# EAGLE board RoverWing-cover (EAGLE 9.2.2)
REV: C
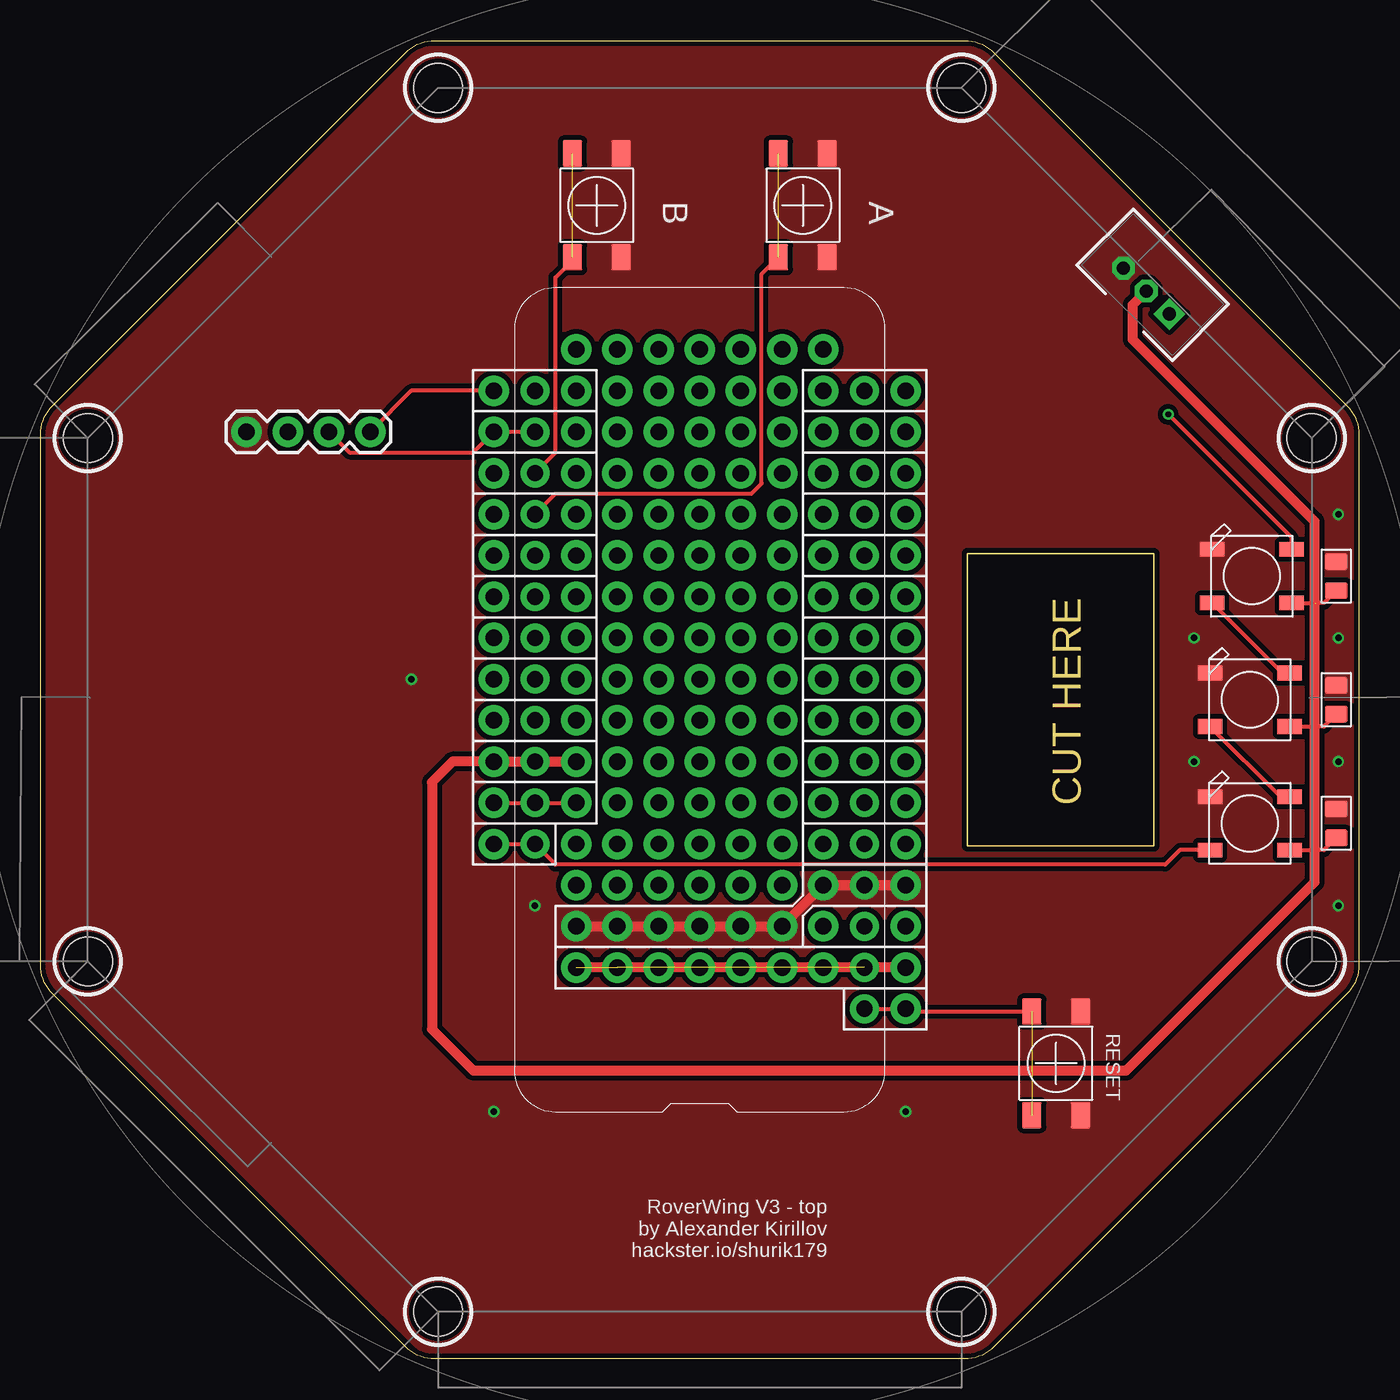
[diagram p0: board, top side]
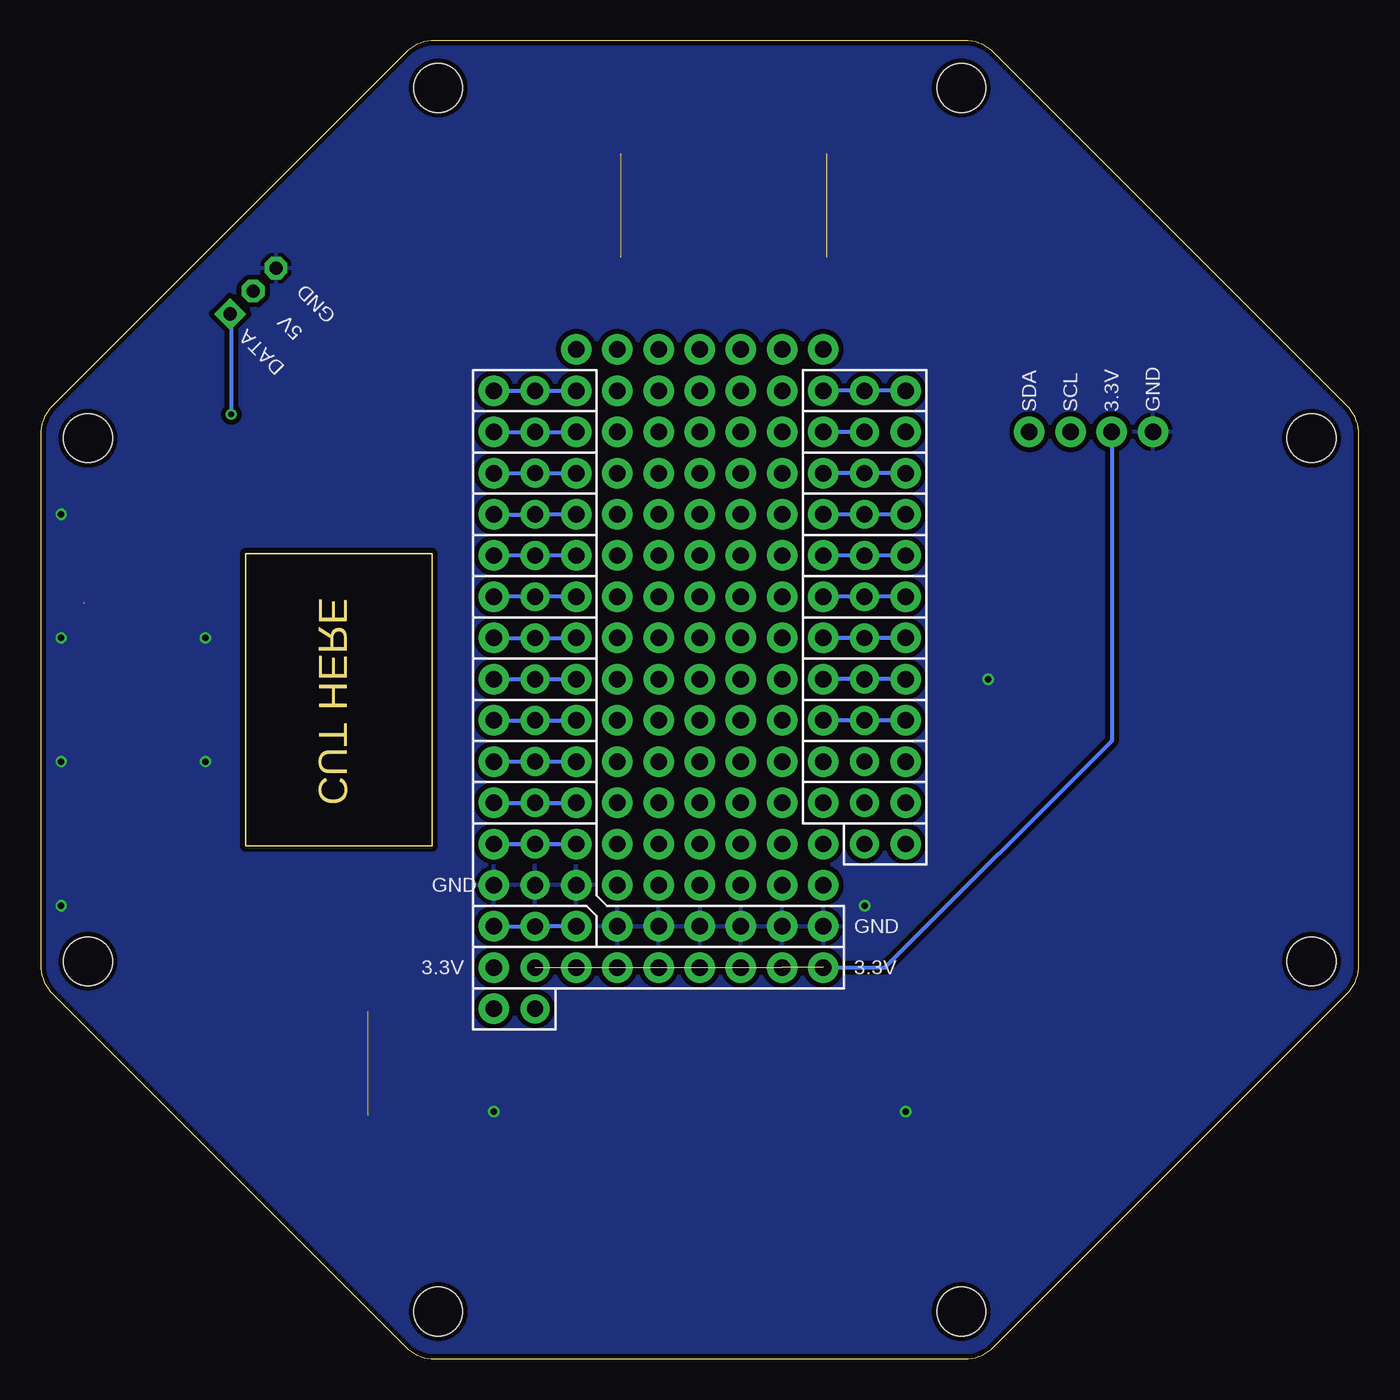
[diagram p1: board, bottom side, seen from below]

Size 81.28 x 81.28 mm. Coordinates in mm from the lower left corner, seen from the top.
Outline: 0,24.29 0,56.99 arc-45 0.74,58.78 22.5,80.54 arc-45 24.29,81.28 56.99,81.28 arc-45 58.78,80.54 80.54,58.78 arc-45 81.28,56.99 81.28,24.29 arc-45 80.54,22.5 58.78,0.74 arc-45 56.99,0 24.29,0 arc-45 22.5,0.74 0.74,22.5 arc-45 0,24.29
Outline: 57.15,49.64 68.65,49.64 68.65,31.64 57.15,31.64 57.15,49.64
Copper layers (1*16): Top 0.035mm / dielectric 1.5mm / Bottom 0.035mm
Design rules "SeeedStudio_2layer_DRU_no_angle_20140221": minimum track width 6mil, minimum drill 12mil, track to track 6mil, track to pad 6mil, pad to pad 6mil, via to via 6mil, smd to smd 0mil, copper to edge 10mil, drill to drill 10mil, minimum pad ring 10mil, minimum via ring 6mil, stop-mask expansion 2mil, vias tented up to drill 100mil, thermal gap 10mil
Net classes: 1 thinpower: width 0.305 mm; 2 thickpower: width 0.406 mm

## Footprints (pad centres in the part's own frame; a part is rotated, then mirrored left to right if it is on the bottom)
C0805 = smd 1.397 x 1.016: 1 0,0.889; 2 0,-0.889
B3B-PH-K = drill 0.813 pad 1.397 square: 1 -2,0 | drill 0.813 pad 1.397 octagon: 2 0,0; 3 2,0
1X04 = drill 1.016 pad 1.88: 1 0,0; 2 2.54,0; 3 5.08,0; 4 7.62,0
1X12_NO_SILK = drill 1.016 pad 1.88: 1 0,0; 2 2.54,0; 3 5.08,0; 4 7.62,0; 5 10.16,0; 6 12.7,0; 7 15.24,0; 8 17.78,0; 9 20.32,0; 10 22.86,0; 11 25.4,0; 12 27.94,0
1X16_NO_SILK = drill 1.016 pad 1.88: 1 0,0; 2 2.54,0; 3 5.08,0; 4 7.62,0; 5 10.16,0; 6 12.7,0; 7 15.24,0; 8 17.78,0; 9 20.32,0; 10 22.86,0; 11 25.4,0; 12 27.94,0; 13 30.48,0; 14 33.02,0; 15 35.56,0; 16 38.1,0
1X07_NO_SILK = drill 1.016 pad 1.88: 1 0,0; 2 2.54,0; 3 5.08,0; 4 7.62,0; 5 10.16,0; 6 12.7,0; 7 15.24,0
FEATHERWING_DIM = drill 1 pad 1.778: 1 6.35,1.27; 2 8.89,1.27; 3 11.43,1.27; 4 13.97,1.27; 5 16.51,1.27; 6 19.05,1.27; 7 21.59,1.27; 8 24.13,1.27; 9 26.67,1.27; 10 29.21,1.27; 11 31.75,1.27; 12 34.29,1.27; 13 36.83,1.27; 14 39.37,1.27; 15 41.91,1.27; 16 44.45,1.27; 17 44.45,21.59; 18 41.91,21.59; 19 39.37,21.59; 20 36.83,21.59; 21 34.29,21.59; 22 31.75,21.59; 23 29.21,21.59; 24 26.67,21.59; 25 24.13,21.59; 26 21.59,21.59; 27 19.05,21.59; 28 16.51,21.59
WS2812B = smd 1.5 x 0.9: 1-VDD 2.45,-1.65; 2-DOUT 2.45,1.65; 3-GND -2.45,1.65; 4-DIN -2.45,-1.65
TL3305 = smd 1.6 x 1.2: 1 -3.2,1.5; 2 -3.2,-1.5; 3 3.2,-1.5; 4 3.2,1.5
MOUNTINGHOLE_3.0_NPH = hole 3: 0,0

## Placement (x,y rotation side)
C1  0.1uF  [C0805]  79.88,33.02 0 top
C2  0.1uF  [C0805]  79.88,40.64 0 top
C3  0.1uF  [C0805]  79.88,48.26 0 top
FRAME2  FRAME-LETTERNO_PACKAGE  [DUMMY]  77.85,82.17 0 top
J1  HEADER-PH-3P  [B3B-PH-K]  68.18,65.84 135 top
J2  [1X04]  12.7,57.15 0 top
J3  [1X12_NO_SILK]  27.94,31.75 90 top
J4  [1X16_NO_SILK]  53.34,59.69 270 top
J5  [1X07_NO_SILK]  33.02,59.69 0 top
J6  [1X07_NO_SILK]  33.02,57.15 0 top
J7  [1X07_NO_SILK]  33.02,54.61 0 top
J9  [1X07_NO_SILK]  33.02,52.07 0 top
J10  [1X07_NO_SILK]  33.02,49.53 0 top
J11  [1X07_NO_SILK]  33.02,46.99 0 top
J12  [1X07_NO_SILK]  33.02,44.45 0 top
J13  [1X07_NO_SILK]  33.02,41.91 0 top
J15  [1X07_NO_SILK]  33.02,39.37 0 top
J16  FEATHERWING_NODIM  [FEATHERWING_DIM]  52.07,15.24 90 top
J17  [1X07_NO_SILK]  33.02,36.83 0 top
J18  [1X07_NO_SILK]  33.02,34.29 0 top
J19  [1X07_NO_SILK]  33.02,31.75 0 top
J20  [1X07_NO_SILK]  33.02,29.21 0 top
J21  [1X07_NO_SILK]  33.02,26.67 0 top
J22  [1X07_NO_SILK]  33.02,24.13 0 top
J23  [1X07_NO_SILK]  33.02,62.23 0 top
LED1  WS2812B5050  [WS2812B]  74.55,33.02 0 top
LED2  WS2812B5050  [WS2812B]  74.55,40.64 0 top
LED3  WS2812B5050  [WS2812B]  74.68,48.26 0 top
S1  SW-TACTILE-4.5X4.5_SMD  [TL3305]  62.61,18.23 270 top
S2  SW-TACTILE-4.5X4.5_SMD  [TL3305]  46.99,71.12 90 top
S3  SW-TACTILE-4.5X4.5_SMD  [TL3305]  34.29,71.12 90 top
U$3  MOUNTINGHOLE3.0_NPH  [MOUNTINGHOLE_3.0_NPH]  24.51,2.92 0 top
U$4  MOUNTINGHOLE3.0_NPH  [MOUNTINGHOLE_3.0_NPH]  56.77,2.92 0 top
U$14  MOUNTINGHOLE3.0_NPH  [MOUNTINGHOLE_3.0_NPH]  2.92,24.51 0 top
U$15  MOUNTINGHOLE3.0_NPH  [MOUNTINGHOLE_3.0_NPH]  2.92,56.77 0 top
U$24  MOUNTINGHOLE3.0_NPH  [MOUNTINGHOLE_3.0_NPH]  78.36,24.51 0 top
U$25  MOUNTINGHOLE3.0_NPH  [MOUNTINGHOLE_3.0_NPH]  78.36,56.77 0 top
U$26  MOUNTINGHOLE3.0_NPH  [MOUNTINGHOLE_3.0_NPH]  24.51,78.36 0 top
U$27  MOUNTINGHOLE3.0_NPH  [MOUNTINGHOLE_3.0_NPH]  56.77,78.36 0 top

## Library data of the parts
C1-C3 S1-S3 = RoverWing
FRAME2 = SparkFun-Aesthetics; DESIGNER: Nobody; VERSION: v01
J1 = RoverWing; PARTNO: B3B-PH-K-S(LF)(SN)
J2 = SparkFun-Connectors; PROD_ID: CONN-09696
J3-J7 J9-J13 J15 J17-J23 = SparkFun-Connectors
J16 = RoverShield
LED1-LED3 = adafruit
U$3 U$4 U$14 U$15 U$24-U$27 = CrickitCopy

## Nets
3.3V: J2.2 J4.15 J16.2 J22.1 J22.2 J22.3 J22.4 J22.5 J22.6 J22.7
5V: C1.2 C2.2 C3.2 J1.2 J3.3 J16.26 J17.1 LED1.1-VDD LED2.1-VDD LED3.1-VDD
A0: J4.12 J16.5 J19.7
A1: J4.11 J16.6 J18.7
A2: J4.10 J16.7 J17.7
A3: J4.9 J15.7 J16.8
A4: J4.8 J13.7 J16.9
A5: J4.7 J12.7 J16.10
AREF: J4.14 J16.3 J21.7
D05: J3.10 J7.1 J16.19 S3.1 S3.4
D06: J3.9 J9.1 J16.20 S2.1 S2.4
D09: J3.8 J10.1 J16.21
D10: J3.7 J11.1 J16.22
D11: J3.6 J12.1 J16.23
D12: J3.5 J13.1 J16.24
D13: J3.4 J15.1 J16.25
EXTRA: J4.1 J5.7 J16.16
FEATHER_RESET: J4.16 J16.1 S1.2 S1.3
GND: C1.1 C2.1 C3.1 J1.3 J2.1 J4.13 J16.4 J20.7 J21.1 J21.2 J21.3 J21.4 J21.5 J21.6 LED1.3-GND LED2.3-GND LED3.3-GND S1.1 S1.4 S2.2 S2.3 S3.2 S3.3
MISO: J4.4 J9.7 J16.13
MOSI: J4.5 J10.7 J16.12
N$1: LED2.2-DOUT LED3.4-DIN
N$3: LED1.2-DOUT LED2.4-DIN
N$6: J19.1
N$37: J3.2 J16.27 J18.1
NEOPIXEL_IN: J3.1 J16.28 LED1.4-DIN
NEOPIXEL_OUT: J1.1 LED3.2-DOUT
RX: J4.3 J7.7 J16.14
SCK: J4.6 J11.7 J16.11
SCL: J2.3 J3.11 J6.1 J16.18
SDA: J2.4 J3.12 J5.1 J16.17
TX: J4.2 J6.7 J16.15

## Tracks (layer width: path | path; a pad name or v marks a point on that pad's centre or on a via)
3.3V  (7 unrouted)
  Top 0.61: J4.15 J22.1
  Bottom 0.254: J22.1 29.21,24.13 15.24,38.1 J2.2
5V  (1 unrouted)
  Top 0.254: 78.55,29.82 78.55,29.4 | LED1.1-VDD 78.29,31.37 78.55,31.12 | C1.2 79.12,31.37 78.55,31.37 | LED2.1-VDD 78.29,38.99 78.55,38.73 | C2.2 79.12,38.99 78.55,38.99 | LED3.1-VDD 78.61,46.61 | C3.2 79.12,46.61 78.55,46.61
  Top 0.406: 78.61,46.61 | LED2.1-VDD
  Top 0.61: J17.1 J16.26 J3.3 25.4,36.83 24.13,35.56 24.13,20.32 26.67,17.78 66.93,17.78 78.55,29.4 78.55,31.12 78.55,31.37 78.55,38.73 78.55,38.99 78.55,46.61 78.55,51.63 67.31,62.87 67.31,64.97 J1.2
A0
  Bottom 0.254: J4.12 J16.5 J19.7
A1
  Bottom 0.254: J4.11 J16.6 J18.7
A2
  Bottom 0.254: J4.10 J16.7 J17.7
A3
  Bottom 0.254: J4.9 J16.8 J15.7
A4
  Bottom 0.254: J4.8 J16.9 J13.7
A5
  Bottom 0.254: J4.7 J16.10 J12.7
AREF
  Bottom 0.254: J4.14 J16.3 J21.7
D05  (1 unrouted)
  Top 0.254: J16.19 31.75,55.88 31.75,66.67 32.79,67.72 S3.1
  Bottom 0.254: J3.10 J16.19 J7.1
D06  (1 unrouted)
  Top 0.254: J16.20 31.75,53.34 43.81,53.34 44.45,53.98 44.45,66.88 S2.1
  Bottom 0.254: J3.9 J16.20 J9.1
D09
  Bottom 0.254: J3.8 J16.21 J10.1
D10
  Bottom 0.254: J3.7 J16.22 J11.1
D11
  Bottom 0.254: J3.6 J16.23 J12.1
D12
  Bottom 0.254: J3.5 J16.24 J13.1
D13
  Bottom 0.254: J3.4 J16.25 J15.1
EXTRA
  Bottom 0.254: J5.7 J16.16 J4.1
FEATHER_RESET  (1 unrouted)
  Top 0.254: J16.1 J4.16 53.51,21.43 S1.2
GND  (via drill 0.39)
  Top 0.61: J21.1 J21.6 J20.7 J4.13
  other vias: 80.01,44.45 71.12,36.83 30.48,27.94 53.34,15.24 80.01,36.83 22.86,41.91 27.94,15.24 71.12,44.45 80.01,52.07 80.01,27.94
  pour Bottom (isolate 0.305, rank 2): 23.24,81.28 -0.13,57.4 0.02,22.99 23.5,0.02 58.04,-0.13 81.28,23.11 81.28,57.91 58.04,81.28
  pour Top (isolate 0.305, rank 2, no thermals): 23.37,81.28 0,57.4 -0.11,32.64 -0.05,23.35 23.75,0.27 58.42,0.12 81.41,23.11 81.41,57.91 58.17,81.28
MISO
  Bottom 0.254: J9.7 J16.13 J4.4
MOSI
  Bottom 0.254: J10.7 J16.12 J4.5
N$1
  Top 0.254: LED2.2-DOUT 76.55,42.29 LED3.4-DIN
N$3
  Top 0.254: LED1.2-DOUT 76.42,34.67 LED2.4-DIN
N$37
  Top 0.254: J3.2 J16.27 J18.1
NEOPIXEL_IN
  Top 0.254: LED1.4-DIN 70.23,31.37 69.34,30.48 31.75,30.48 J16.28 J3.1
NEOPIXEL_OUT  (via drill 0.35)
  Top 0.254: LED3.2-DOUT 77.13,50.64 v69.53,58.24
  Bottom 0.254: J1.1 69.53,64.36 v69.53,58.24
RX
  Bottom 0.254: J4.3 J16.14 J7.7
SCK
  Bottom 0.254: J11.7 J16.11 J4.6
SCL
  Top 0.254: J16.18 J3.11 26.67,55.88 19.05,55.88 J2.3
  Bottom 0.254: J16.18 J6.1
SDA
  Top 0.254: J3.12 22.86,59.69 J2.4
  Bottom 0.254: J3.12 J16.17 J5.1
TX
  Bottom 0.254: J4.2 J16.15 J6.7

## Text on the board
Dimension: CUT HERE
tNames: B | A | RESET | RoverWing V3 - top / by Alexander Kirillov / hackster.io/shurik179
bNames: GND | 5V | DATA | GND | 3.3V | SCL | SDA | GND | GND | 3.3V | 3.3V